# Altium PCB 00.Main.PcbDoc (part 5 of 5)
Units mm, origin at the board's own origin, x right, y up, seen from the top; angles counter-clockwise.
Board outline 300 x 165 mm, 2 copper layers (Top Layer, Bottom Layer); 76 components, 103 nets, 576 pads, 97 vias.
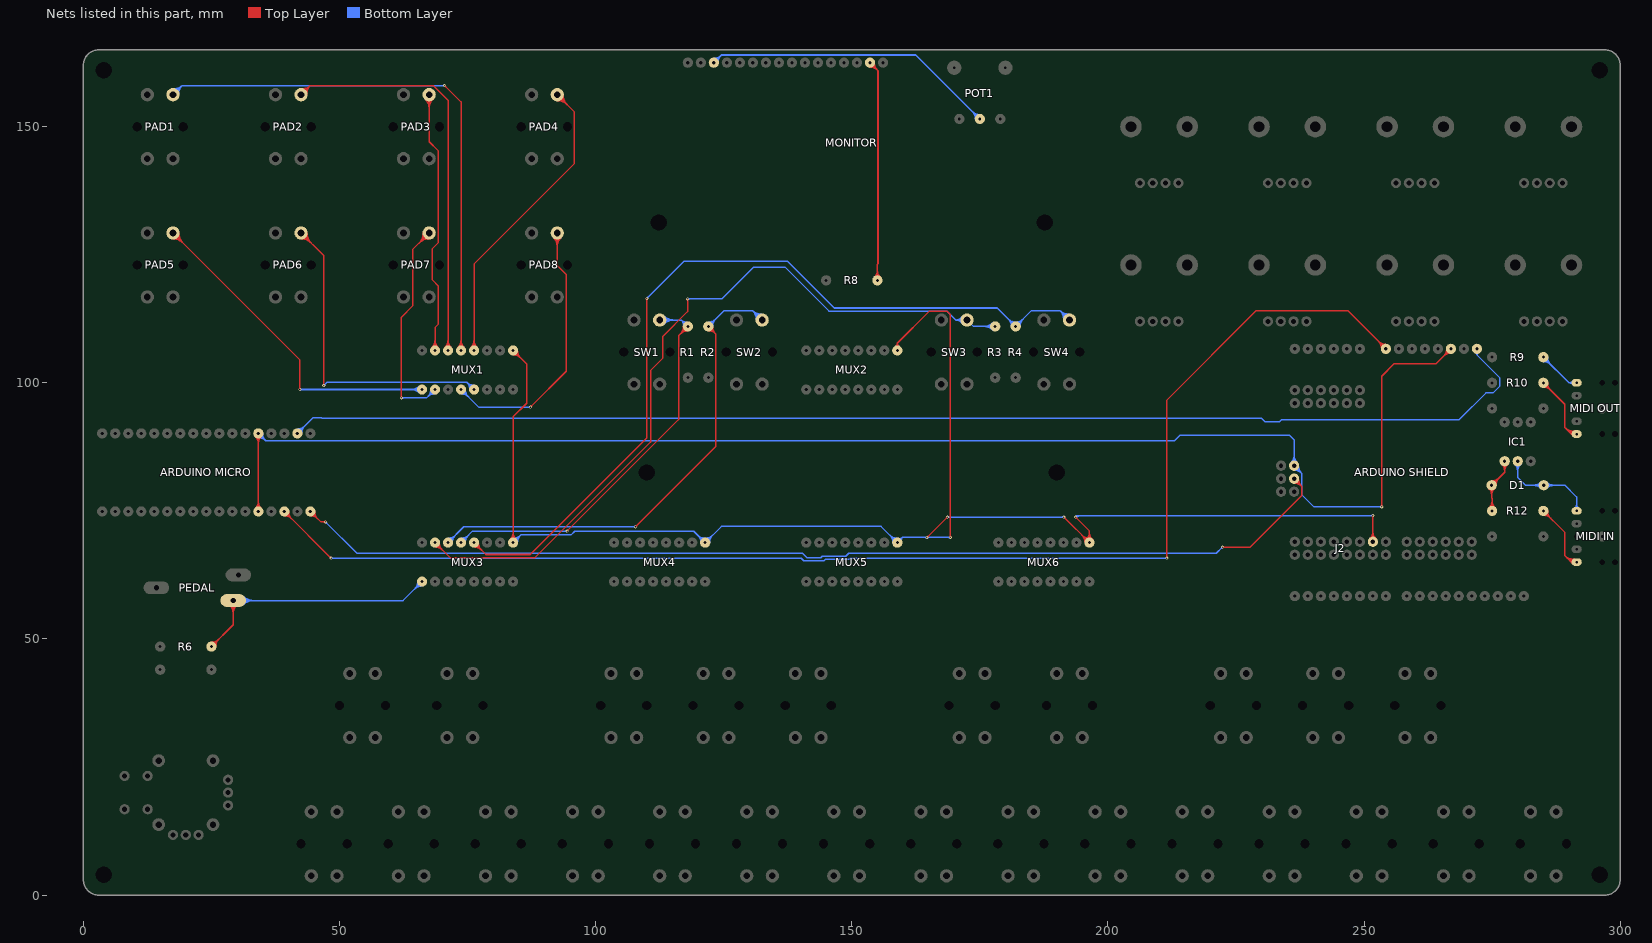
[diagram p5: the nets of this part, all layers, seen from the top]

## Via types
v1: diameter 0.6, hole 0.3, Top Layer to Bottom Layer, 97 vias

## Nets (pads, with @x,y where several pads share a name; then routed paths per layer and width w, separated by ;. In a path a pad name is that pad's centre, name@x,y a point inside that pad or via, vN(x,y) a via of type N, cw(c..) or ccw(c..) an arc to the next point about the centre after c; other vN are vias at no path point) (continued)
MUX_SC: J2.14 MUX1.9 MUX2.9 MUX3.9 MUX4.9 MUX5.9 MUX6.9 | length 351.6
  Top Layer w0.3: MUX3.9@83.289,69.411 ccw(c81.838,70.862) 83.89,70.862 ccw(c85.942,70.862) MUX3.9@84.491,69.411 ; MUX3.9@83.501,69.199 ccw(c82.562,70.138) 83.89,70.138 ccw(c85.218,70.138) MUX3.9@84.279,69.199 ; MUX3.9@83.89,68.81 83.89,93.366 86.54,96.016 86.54,103.66 MUX1.9@83.89,106.31 ; MUX1.9@83.89,105.46 cw(c83.89,103.408) 85.341,104.859 cw(c86.792,106.31) MUX1.9@84.74,106.31 ; MUX1.9@83.89,105.76 cw(c83.89,104.432) 84.829,105.371 cw(c85.768,106.31) MUX1.9@84.44,106.31 ; MUX2.9@158.498,107.064 ccw(c158.164,107.709) 158.89,107.709 ; MUX2.9@158.89,106.31 158.89,107.709 ; MUX2.9@159.281,107.064 cw(c159.616,107.709) 158.89,107.709 ; v1(164.679,69.811) v1(168.667,73.798) ; v1@164.679,69.961 ccw(c164.679,70.323) 164.935,70.067 ccw(c165.191,69.811) v1@164.829,69.811 ; v1@168.517,73.798 cw(c168.155,73.798) 168.411,73.542 cw(c168.667,73.286) v1@168.667,73.648 ; v1@169.145,69.917 ccw(c168.889,70.173) 169.251,70.173 ccw(c169.613,70.173) v1@169.357,69.917 ; v1(169.251,69.811) 169.251,113.295 168.54,114.007 165.188,114.007 158.89,107.709 ; v1@191.402,73.648 cw(c191.402,73.286) 191.658,73.542 cw(c191.914,73.798) v1@191.552,73.798 ; v1(191.402,73.798) MUX6.9@196.39,68.81 196.39,71.094 v1(193.686,73.798) ; v1@193.686,73.648 cw(c193.686,73.286) 193.942,73.542 cw(c194.198,73.798) v1@193.836,73.798 ; MUX6.9@195.54,68.81 ccw(c193.488,68.81) 194.939,70.261 ccw(c196.39,71.712) MUX6.9@196.39,69.66 ; MUX6.9@195.789,69.411 ccw(c194.338,70.862) 196.39,70.862 ccw(c198.442,70.862) MUX6.9@196.991,69.411 ; MUX6.9@195.84,68.81 ccw(c194.512,68.81) 195.451,69.749 ccw(c196.39,70.688) MUX6.9@196.39,69.36 ; MUX6.9@196.001,69.199 ccw(c195.062,70.138) 196.39,70.138 ccw(c197.718,70.138) MUX6.9@196.779,69.199 ; J2.14@251.127,69.571 ccw(c249.676,71.022) 251.728,71.022 ccw(c253.78,71.022) J2.14@252.329,69.571 ; J2.14@251.339,69.359 ccw(c250.4,70.298) 251.728,70.298 ccw(c253.056,70.298) J2.14@252.117,69.359 ; v1@251.622,73.972 cw(c251.366,73.716) 251.728,73.716 cw(c252.09,73.716) v1@251.834,73.972 ; J2.14@251.728,68.97 v1(251.728,74.078)
  Bottom Layer w0.3: MUX3.9@83.89,68.81 85.38,70.3 95.182,70.3 95.926,71.044 119.156,71.044 MUX4.9@121.39,68.81 124.55,71.97 155.73,71.97 MUX5.9@158.89,68.81 159.891,69.811 ; MUX3.9@83.89,69.36 ccw(c83.89,70.688) 84.829,69.749 ccw(c85.768,68.81) MUX3.9@84.44,68.81 ; MUX3.9@83.89,69.66 ccw(c83.89,71.712) 85.341,70.261 ccw(c86.792,68.81) MUX3.9@84.74,68.81 ; MUX4.9@120.54,68.81 ccw(c118.488,68.81) 119.939,70.261 ccw(c121.39,71.712) 121.39,69.66 ccw(c121.39,71.712) 122.841,70.261 ccw(c124.292,68.81) MUX4.9@122.24,68.81 ; MUX4.9@120.84,68.81 ccw(c119.512,68.81) 120.451,69.749 ccw(c121.39,70.688) 121.39,69.36 ccw(c121.39,70.688) 122.329,69.749 ccw(c123.268,68.81) MUX4.9@121.94,68.81 ; MUX5.9@158.04,68.81 ccw(c155.988,68.81) 157.439,70.261 ccw(c158.89,71.712) MUX5.9@158.89,69.66 ; MUX5.9@158.34,68.81 ccw(c157.012,68.81) 157.951,69.749 ccw(c158.89,70.688) MUX5.9@158.89,69.36 ; MUX5.9@159.138,69.623 ccw(c159.358,70.343) 159.891,69.811 ; MUX5.9@159.703,69.058 cw(c160.423,69.278) 159.891,69.811 ; v1@164.573,69.705 ccw(c164.317,69.448) 164.317,69.811 ccw(c164.317,70.173) v1@164.573,69.917 ; v1@164.785,69.705 cw(c165.041,69.448) 165.041,69.811 cw(c165.041,70.173) v1@164.785,69.917 ; v1(168.667,73.798) v1(191.402,73.798) ; v1@168.773,73.692 cw(c169.029,73.436) 169.029,73.798 cw(c169.029,74.161) v1@168.773,73.904 ; v1@169.145,69.705 ccw(c168.889,69.448) 168.889,69.811 ccw(c168.889,70.173) v1@169.145,69.917 ; v1(169.251,69.811) v1(164.679,69.811) 159.891,69.811 ; v1@191.296,73.692 ccw(c191.039,73.436) 191.039,73.798 ccw(c191.039,74.161) v1@191.296,73.904 ; v1(193.686,73.798) 193.915,74.027 247.001,74.027 247.051,74.078 v1(251.728,74.078) ; v1@193.792,73.692 cw(c194.6,72.884) 194.6,74.027 ; v1@251.622,73.972 ccw(c251.366,73.716) 251.366,74.078 ccw(c251.366,74.44) v1@251.622,74.184
NetD1_1: "MIDI IN.5" D1.1 IC1.2 | length 37.2
  Bottom Layer w0.3: IC1.2@279.399,84.089 cw(c277.948,82.638) 280,82.638 cw(c282.052,82.638) IC1.2@280.601,84.089 ; IC1.2@279.611,84.301 cw(c278.672,83.362) 280,83.362 cw(c281.328,83.362) IC1.2@280.389,84.301 ; IC1.2@280,84.69 280,81.52 281.52,80 D1.1@285.08,80 289.21,80 291.5,77.71 291.5,75 ; D1.1@284.479,79.399 ccw(c283.028,77.948) 283.028,80 ccw(c283.028,82.052) D1.1@284.479,80.601 ; D1.1@284.691,79.611 ccw(c283.752,78.672) 283.752,80 ccw(c283.752,81.328) D1.1@284.691,80.389 ; D1.1@285.469,79.611 cw(c286.408,78.672) 286.408,80 cw(c286.408,81.328) D1.1@285.469,80.389 ; D1.1@285.681,79.399 cw(c287.132,77.948) 287.132,80 cw(c287.132,82.052) D1.1@285.681,80.601 ; 291.076,75.424 ccw(c290.051,76.449) 291.5,76.449 ccw(c292.949,76.449) 291.924,75.424
NetD1_2: D1.2 IC1.1 R12.2 | length 32
  Top Layer w0.3: D1.2@274.319,79.399 cw(c272.868,77.948) 274.92,77.948 cw(c276.972,77.948) D1.2@275.521,79.399 ; R12.2@274.399,75.601 ccw(c272.948,77.052) 275,77.052 ccw(c277.052,77.052) R12.2@275.601,75.601 ; D1.2@274.531,79.611 cw(c273.592,78.672) 274.92,78.672 cw(c276.248,78.672) D1.2@275.309,79.611 ; R12.2@274.611,75.389 ccw(c273.672,76.328) 275,76.328 ccw(c276.328,76.328) R12.2@275.389,75.389 ; D1.2@274.92,80.55 ccw(c274.92,81.878) 275.859,80.939 ccw(c276.798,80) D1.2@275.47,80 ; D1.2@274.92,80.85 ccw(c274.92,82.902) 276.371,81.451 ccw(c277.822,80) D1.2@275.77,80 ; R12.2@275,75 275,77.456 274.92,77.536 D1.2@274.92,80 277.46,82.54 IC1.1@277.46,84.69 ; IC1.1@276.859,84.089 cw(c275.408,82.638) 277.46,82.638 cw(c279.512,82.638) IC1.1@278.061,84.089 ; IC1.1@277.071,84.301 cw(c276.132,83.362) 277.46,83.362 cw(c278.788,83.362) IC1.1@277.849,84.301
"NetMIDI IN_2": "MIDI IN.2" R12.1 | length 25.6
  Top Layer w0.3: R12.1@285,74.15 cw(c285,72.098) 286.451,73.549 cw(c287.902,75) R12.1@285.85,75 ; R12.1@285,74.45 cw(c285,73.122) 285.939,74.061 cw(c286.878,75) R12.1@285.55,75 ; R12.1@285,75 289.149,70.851 289.149,66.28 ; 289.579,65.85 ccw(c290.955,67.226) 291.211,65.297 ; 290.008,65.421 ccw(c291.055,66.468) 291.25,65 ; 290.438,64.991 ccw(c291.156,65.709) 291.289,64.703 ; 290.678,64.818 ccw(c290.429,64.739) 290.429,65 ; 290.678,65.182 cw(c290.429,65.261) 290.429,65 ; 291.171,65.595 cw(c290.854,67.985) 289.149,66.28 ; 291.5,65 290.429,65 ; 289.149,66.28 290.429,65
"NetMIDI OUT_2": "MIDI OUT.2" R10.1 | length 25.3
  Top Layer w0.3: R10.1@285,99.15 cw(c285,97.098) 286.451,98.549 cw(c287.902,100) R10.1@285.85,100 ; R10.1@285,99.45 cw(c285,98.122) 285.939,99.061 cw(c286.878,100) R10.1@285.55,100 ; R10.1@285,100 289.19,95.81 289.19,91.27 ; 289.621,90.839 ccw(c290.966,92.184) 291.211,90.297 ; 290.052,90.408 ccw(c291.065,91.421) 291.25,90 ; 290.483,89.977 ccw(c291.165,90.658) 291.289,89.702 ; 290.672,89.839 ccw(c290.46,89.78) 290.46,90 ; 290.672,90.161 cw(c290.46,90.22) 290.46,90 ; 291.173,90.595 cw(c290.867,92.947) 289.19,91.27 ; 291.5,90 290.46,90 ; 289.19,91.27 290.46,90
"NetMIDI OUT_5": "MIDI OUT.5" R9.1 | length 15.7
  Bottom Layer w0.3: R9.1@285,104.15 cw(c285,102.098) 286.451,103.549 cw(c287.902,105) R9.1@285.85,105 ; R9.1@285,104.45 cw(c285,103.122) 285.939,104.061 cw(c286.878,105) R9.1@285.55,105 ; R9.1@285,105 290,100 ; 290.782,99.625 ccw(c290,98.998) 290,100 ; 290.782,100.375 cw(c290,101.002) 290,100 ; 291.5,100 290,100
NetMONITOR_3: MONITOR.3 POT1.2 | length 68.3
  Bottom Layer w0.3: MONITOR.3@123.08,162.5 124.574,163.994 162.506,163.994 POT1.2@175,151.5 ; MONITOR.3@123.08,163.05 ccw(c123.08,164.378) 124.019,163.439 ccw(c124.958,162.5) MONITOR.3@123.63,162.5 ; MONITOR.3@123.08,163.35 ccw(c123.08,165.402) 124.531,163.951 ccw(c125.982,162.5) MONITOR.3@123.93,162.5 ; POT1.2@174.15,151.5 ccw(c172.098,151.5) 173.549,152.951 ccw(c175,154.402) POT1.2@175,152.35 ; POT1.2@174.45,151.5 ccw(c173.122,151.5) 174.061,152.439 ccw(c175,153.378) POT1.2@175,152.05
NetMONITOR_15: MONITOR.15 R8.2 | length 53.8
  Top Layer w0.3: MONITOR.15@153.56,161.65 cw(c153.56,159.598) 155.011,161.049 cw(c156.462,162.5) MONITOR.15@154.41,162.5 ; MONITOR.15@153.56,161.95 cw(c153.56,160.622) 154.499,161.561 ; MONITOR.15@153.56,162.5 155.12,160.94 155.12,123.282 155,123.162 R8.2@155,120 ; MONITOR.15@154.11,162.5 ccw(c155.438,162.5) 154.499,161.561 ; R8.2@154.399,120.601 ccw(c152.948,122.052) 155,122.052 ccw(c157.052,122.052) R8.2@155.601,120.601 ; R8.2@154.611,120.389 ccw(c153.672,121.328) 155,121.328 ccw(c156.328,121.328) R8.2@155.389,120.389
PAD1: MUX1.13 PAD1.2 | length 119.7
  Top Layer w0.3: v1@70.521,157.875 cw(c70.521,157.513) 70.777,157.769 cw(c71.034,158.025) v1@70.671,158.025 ; v1(70.521,158.025) 73.73,154.816 MUX1.13@73.73,106.31 ; MUX1.13@73.129,106.911 ccw(c71.678,108.362) 73.73,108.362 ccw(c75.782,108.362) MUX1.13@74.331,106.911 ; MUX1.13@73.341,106.699 ccw(c72.402,107.638) 73.73,107.638 ccw(c75.058,107.638) MUX1.13@74.119,106.699
  Bottom Layer w0.3: PAD1.2@17.5,156.25 19.275,158.025 ; PAD1.2@17.563,157.098 ccw(c17.681,158.693) 18.812,157.562 ccw(c19.943,156.431) PAD1.2@18.348,156.313 ; PAD1.2@17.585,157.397 ccw(c17.745,159.555) 19.275,158.025 ; PAD1.2@18.647,156.335 cw(c20.805,156.495) 19.275,158.025 ; v1@70.415,157.919 ccw(c70.159,157.663) 70.159,158.025 ccw(c70.159,158.387) v1@70.415,158.131 ; v1(70.521,158.025) 19.275,158.025
PAD2: MUX1.14 PAD2.2 | length 91.2
  Top Layer w0.3: PAD2.2@42.5,156.25 44.275,158.025 ; PAD2.2@42.563,157.098 ccw(c42.681,158.693) 43.812,157.562 ccw(c44.943,156.431) PAD2.2@43.348,156.313 ; PAD2.2@42.585,157.397 ccw(c42.745,159.555) 44.275,158.025 ; PAD2.2@43.647,156.335 cw(c45.805,156.495) 44.275,158.025 ; MUX1.14@70.589,106.911 ccw(c69.138,108.362) 71.19,108.362 ccw(c73.242,108.362) MUX1.14@71.791,106.911 ; MUX1.14@70.801,106.699 ccw(c69.862,107.638) 71.19,107.638 ccw(c72.518,107.638) MUX1.14@71.579,106.699 ; MUX1.14@71.19,106.31 71.19,155.146 68.312,158.025 44.275,158.025
PAD3: MUX1.15 PAD3.2 | length 66.8
  Top Layer w0.3: PAD3.2@66.687,155.437 cw(c64.724,153.474) 67.5,153.474 cw(c70.276,153.474) PAD3.2@68.313,155.437 ; PAD3.2@66.899,155.649 cw(c65.448,154.198) 67.5,154.198 cw(c69.552,154.198) PAD3.2@68.101,155.649 ; PAD3.2@67.111,155.861 cw(c66.172,154.922) 67.5,154.922 cw(c68.828,154.922) PAD3.2@67.889,155.861 ; PAD3.2@67.5,156.25 67.5,147.077 69.251,145.326 69.251,127.316 68.134,126.199 68.134,120.077 69.251,118.96 69.251,111.39 68.65,110.789 MUX1.15@68.65,106.31 ; MUX1.15@68.049,106.911 ccw(c66.598,108.362) 68.65,108.362 ccw(c70.702,108.362) MUX1.15@69.251,106.911 ; MUX1.15@68.261,106.699 ccw(c67.322,107.638) 68.65,107.638 ccw(c69.978,107.638) MUX1.15@69.039,106.699
PAD4: MUX1.12 PAD4.2 | length 74.4
  Top Layer w0.3: MUX1.12@75.669,106.911 ccw(c74.218,108.362) 76.27,108.362 ccw(c78.322,108.362) MUX1.12@76.871,106.911 ; MUX1.12@75.881,106.699 ccw(c74.942,107.638) 76.27,107.638 ccw(c77.598,107.638) MUX1.12@76.659,106.699 ; MUX1.12@76.27,106.31 76.27,123.184 95.871,142.785 95.871,152.879 PAD4.2@92.5,156.25 ; PAD4.2@92.5,155.1 cw(c92.5,152.324) 94.463,154.287 cw(c96.426,156.25) PAD4.2@93.65,156.25 ; PAD4.2@92.5,155.4 cw(c92.5,153.348) 93.951,154.799 cw(c95.402,156.25) PAD4.2@93.35,156.25 ; PAD4.2@92.5,155.7 cw(c92.5,154.372) 93.439,155.311 cw(c94.378,156.25) PAD4.2@93.05,156.25
PAD5: MUX1.1 PAD5.2 | length 80.8
  Top Layer w0.3: PAD5.2@17.5,128.1 cw(c17.5,125.324) 19.463,127.287 cw(c21.426,129.25) PAD5.2@18.65,129.25 ; PAD5.2@17.5,128.4 cw(c17.5,126.348) 18.951,127.799 cw(c20.402,129.25) PAD5.2@18.35,129.25 ; PAD5.2@17.5,128.7 cw(c17.5,127.372) 18.439,128.311 cw(c19.378,129.25) PAD5.2@18.05,129.25 ; PAD5.2@17.5,129.25 42.277,104.473 v1(42.277,98.69) ; v1@42.171,98.796 ccw(c41.914,99.052) 42.277,99.052 ccw(c42.639,99.052) v1@42.383,98.796
  Bottom Layer w0.3: v1(42.277,98.69) MUX1.1@66.11,98.69 ; v1@42.383,98.584 cw(c42.639,98.328) 42.639,98.69 cw(c42.639,99.052) v1@42.383,98.796 ; MUX1.1@65.509,98.089 ccw(c64.058,96.638) 64.058,98.69 ccw(c64.058,100.742) MUX1.1@65.509,99.291 ; MUX1.1@65.721,98.301 ccw(c64.782,97.362) 64.782,98.69 ccw(c64.782,100.018) MUX1.1@65.721,99.079
PAD6: MUX1.5 PAD6.2 | length 78
  Top Layer w0.3: PAD6.2@42.5,128.1 cw(c42.5,125.324) 44.463,127.287 cw(c46.426,129.25) PAD6.2@43.65,129.25 ; PAD6.2@42.5,128.4 cw(c42.5,126.348) 43.951,127.799 cw(c45.402,129.25) PAD6.2@43.35,129.25 ; PAD6.2@42.5,128.7 cw(c42.5,127.372) 43.439,128.311 cw(c44.378,129.25) PAD6.2@43.05,129.25 ; PAD6.2@42.5,129.25 46.925,124.825 v1(46.925,99.452) ; v1@46.819,99.558 ccw(c46.563,99.815) 46.925,99.815 ccw(c47.287,99.815) v1@47.031,99.558
  Bottom Layer w0.3: v1(46.925,99.452) 47.612,100.14 74.82,100.14 ; v1@46.925,99.602 ccw(c46.925,99.965) 47.181,99.708 ccw(c47.437,99.452) v1@47.075,99.452 ; MUX1.5@75.42,98.69 ccw(c73.372,98.692) 74.82,100.14 ; MUX1.5@75.72,98.69 ccw(c74.395,98.691) 75.332,99.628 ccw(c76.269,100.565) MUX1.5@76.27,99.24 ; MUX1.5@76.27,98.69 74.82,100.14 ; MUX1.5@76.27,99.54 cw(c76.269,101.588) 74.82,100.14
PAD7: MUX1.2 PAD7.2 | length 57.8
  Top Layer w0.3: v1@61.983,97.145 ccw(c61.726,97.402) 62.089,97.402 ccw(c62.451,97.402) v1@62.195,97.145 ; v1(62.089,97.039) 62.089,112.813 64.273,114.997 64.273,126.023 PAD7.2@67.5,129.25 ; PAD7.2@66.35,129.25 cw(c63.574,129.25) 65.537,127.287 cw(c67.5,125.324) PAD7.2@67.5,128.1 ; PAD7.2@66.65,129.25 cw(c64.598,129.25) 66.049,127.799 cw(c67.5,126.348) PAD7.2@67.5,128.4 ; PAD7.2@66.95,129.25 cw(c65.622,129.25) 66.561,128.311 cw(c67.5,127.372) PAD7.2@67.5,128.7
  Bottom Layer w0.3: v1(62.089,97.039) 66.999,97.039 MUX1.2@68.65,98.69 ; v1@62.195,96.933 cw(c62.451,96.677) 62.451,97.039 cw(c62.451,97.402) v1@62.195,97.145 ; MUX1.2@67.8,98.69 cw(c65.748,98.69) 67.199,97.239 cw(c68.65,95.788) MUX1.2@68.65,97.84 ; MUX1.2@68.1,98.69 cw(c66.772,98.69) 67.711,97.751 cw(c68.65,96.812) MUX1.2@68.65,98.14
PAD8: MUX1.4 PAD8.2 | length 68.7
  Top Layer w0.3: v1(87.285,95.261) 94.27,102.246 94.27,121.119 92.5,122.889 PAD8.2@92.5,129.25 ; v1@87.285,95.411 ccw(c87.285,95.774) 87.541,95.517 ccw(c87.798,95.261) v1@87.435,95.261 ; PAD8.2@91.687,128.437 cw(c89.724,126.474) 92.5,126.474 cw(c95.276,126.474) PAD8.2@93.313,128.437 ; PAD8.2@91.899,128.649 cw(c90.448,127.198) 92.5,127.198 cw(c94.552,127.198) PAD8.2@93.101,128.649 ; PAD8.2@92.111,128.861 cw(c91.172,127.922) 92.5,127.922 cw(c93.828,127.922) PAD8.2@92.889,128.861
  Bottom Layer w0.3: MUX1.4@73.73,97.84 cw(c73.73,95.788) 75.181,97.239 cw(c76.632,98.69) MUX1.4@74.58,98.69 ; MUX1.4@73.73,98.14 cw(c73.73,96.812) 74.669,97.751 cw(c75.608,98.69) MUX1.4@74.28,98.69 ; MUX1.4@73.73,98.69 77.159,95.261 v1(87.285,95.261) ; v1@87.179,95.155 ccw(c86.923,94.899) 86.923,95.261 ccw(c86.923,95.624) v1@87.179,95.367
PEDAL: MUX3.1 PEDAL.2 R6.2 | length 74.2
  Top Layer w0.3: R6.2@25,48.5 29.25,52.75 PEDAL.2@29.25,57.5 ; R6.2@25,49.05 ccw(c25,50.378) 25.939,49.439 ccw(c26.878,48.5) R6.2@25.55,48.5 ; R6.2@25,49.35 ccw(c25,51.402) 26.451,49.951 ccw(c27.902,48.5) R6.2@25.85,48.5 ; PEDAL.2@28.472,56.722 cw(c26.594,54.844) 29.25,54.844 cw(c31.906,54.844) PEDAL.2@30.028,56.722 ; PEDAL.2@28.684,56.934 cw(c27.319,55.569) 29.25,55.569 cw(c31.181,55.569) PEDAL.2@29.816,56.934
  Bottom Layer w0.3: PEDAL.2@29.25,57.5 62.42,57.5 MUX3.1@66.11,61.19 ; PEDAL.2@31.066,56.934 cw(c32.431,55.569) 32.431,57.5 cw(c32.431,59.431) PEDAL.2@31.066,58.066 ; PEDAL.2@31.278,56.722 cw(c33.156,54.844) 33.156,57.5 cw(c33.156,60.156) PEDAL.2@31.278,58.278 ; MUX3.1@65.26,61.19 cw(c63.208,61.19) 64.659,59.739 cw(c66.11,58.288) MUX3.1@66.11,60.34 ; MUX3.1@65.56,61.19 cw(c64.232,61.19) 65.171,60.251 cw(c66.11,59.312) MUX3.1@66.11,60.64
RESET: "ARDUINO MICRO.13" "ARDUINO MICRO.22" "ARDUINO SHIELD.3" "ARDUINO SHIELD.5\"" | length 321
  Top Layer w0.3: 33.559,75.481 ccw(c32.108,76.932) 34.16,76.932 ccw(c36.212,76.932) 34.761,75.481 ; 33.559,89.519 cw(c32.108,88.068) 34.16,88.068 cw(c36.212,88.068) 34.761,89.519 ; 33.771,75.269 ccw(c32.832,76.208) 34.16,76.208 ccw(c35.488,76.208) 34.549,75.269 ; 33.771,89.731 cw(c32.832,88.792) 34.16,88.792 cw(c35.488,88.792) 34.549,89.731 ; 34.16,74.88 34.16,90.12 ; v1@253.346,75.886 ccw(c253.09,76.142) 253.452,76.142 ccw(c253.814,76.142) v1@253.558,75.886 ; v1(253.452,75.78) 253.452,101.281 255.916,103.745 264.083,103.745 266.968,106.63 ; 266.118,106.63 cw(c264.066,106.63) 265.517,105.179 cw(c266.968,103.728) 266.968,105.78 ; 266.418,106.63 cw(c265.09,106.63) 266.029,105.691 cw(c266.968,104.752) 266.968,106.08
  Bottom Layer w0.3: 34.16,89.27 cw(c34.16,87.218) 35.611,88.669 cw(c37.062,90.12) 35.01,90.12 ; 34.16,89.57 cw(c34.16,88.242) 35.099,89.181 cw(c36.038,90.12) 34.71,90.12 ; 34.16,90.12 35.623,88.657 212.95,88.657 214.03,89.738 235.508,89.738 236.348,88.897 236.348,83.82 237.806,82.362 237.806,78.193 240.219,75.78 v1(253.452,75.78) ; 235.747,84.421 ccw(c234.296,85.872) 236.348,85.872 ccw(c238.4,85.872) 236.949,84.421 ; 235.959,84.209 ccw(c235.02,85.148) 236.348,85.148 ccw(c237.676,85.148) 236.737,84.209 ; 236.348,82.97 cw(c236.348,80.918) 237.799,82.369 cw(c239.25,83.82) 237.198,83.82 ; 236.348,83.27 cw(c236.348,81.942) 237.287,82.881 cw(c238.226,83.82) 236.898,83.82 ; v1@253.346,75.674 ccw(c253.09,75.417) 253.09,75.78 ccw(c253.09,76.142) v1@253.346,75.886
SCK: "ARDUINO MICRO.17" "ARDUINO SHIELD.3\"" | length 219
  Top Layer w0.3: 44.32,74.03 cw(c44.32,71.978) 45.771,73.429 cw(c47.222,74.88) 45.17,74.88 ; 44.32,74.33 cw(c44.32,73.002) 45.259,73.941 cw(c46.198,74.88) 44.87,74.88 ; 44.32,74.88 46.367,72.833 v1(47.28,72.833) ; v1@47.174,72.727 ccw(c46.918,72.471) 46.918,72.833 ccw(c46.918,73.195) v1@47.174,72.939 ; v1(222.388,67.931) 227.773,67.931 237.798,77.956 237.798,79.83 ; v1@222.494,67.825 cw(c222.75,67.569) 222.75,67.931 cw(c222.75,68.293) v1@222.494,68.037 ; 236.348,80.43 cw(c236.35,78.382) 237.798,79.83 ; 236.348,80.73 cw(c236.349,79.405) 237.286,80.342 cw(c238.223,81.279) 236.898,81.28 ; 236.348,81.28 237.798,79.83 ; 237.198,81.28 ccw(c239.246,81.279) 237.798,79.83
  Bottom Layer w0.3: v1@47.28,72.683 cw(c47.28,72.321) 47.536,72.577 cw(c47.793,72.833) v1@47.43,72.833 ; v1(47.28,72.833) 53.402,66.712 140.395,66.712 141.247,65.86 143.957,65.86 144.257,66.16 148.84,66.16 149.392,66.712 221.169,66.712 v1(222.388,67.931) ; v1@222.238,67.931 cw(c221.876,67.931) 222.132,67.675 cw(c222.388,67.419) v1@222.388,67.781
SS: "ARDUINO MICRO.19" "ARDUINO SHIELD.1" | length 254.6
  Bottom Layer w0.3: 41.78,90.12 44.877,93.217 46.493,93.217 46.633,93.077 229.987,93.077 230.676,92.387 233.505,92.387 233.898,92.78 268.552,92.78 273.803,98.03 275.195,98.03 276.465,99.3 276.465,101.027 272.048,105.444 ; 41.78,90.67 ccw(c41.78,91.998) 42.719,91.059 ccw(c43.658,90.12) 42.33,90.12 ; 41.78,90.97 ccw(c41.78,93.022) 43.231,91.571 ccw(c44.682,90.12) 42.63,90.12 ; 271.775,105.825 cw(c271.645,105.444) 272.048,105.444 ; 272.048,106.63 272.048,105.444 ; 272.321,105.825 ccw(c272.451,105.444) 272.048,105.444
SW1: MUX3.13 R1.2 SW1.2 | length 103
  Top Layer w0.3: v1(94.423,71.055) 116.191,92.823 116.191,109.191 R1.2@118,111 ; v1@94.423,71.205 ccw(c94.423,71.567) 94.679,71.311 ccw(c94.935,71.055) v1@94.573,71.055 ; R1.2@117.15,111 cw(c115.098,111) 116.549,109.549 cw(c118,108.098) R1.2@118,110.15 ; R1.2@117.45,111 cw(c116.122,111) 117.061,110.061 cw(c118,109.122) R1.2@118,110.45
  Bottom Layer w0.3: MUX3.13@73.73,68.81 75.975,71.055 v1(94.423,71.055) ; MUX3.13@73.73,69.36 ccw(c73.73,70.688) 74.669,69.749 ccw(c75.608,68.81) MUX3.13@74.28,68.81 ; MUX3.13@73.73,69.66 ccw(c73.73,71.712) 75.181,70.261 ccw(c76.632,68.81) MUX3.13@74.58,68.81 ; v1@94.317,70.949 ccw(c94.061,70.693) 94.061,71.055 ccw(c94.061,71.417) v1@94.317,71.161 ; SW1.2@112.5,112.25 116.75,112.25 R1.2@118,111 ; SW1.2@112.889,111.861 cw(c113.828,110.922) 113.828,112.25 cw(c113.828,113.578) SW1.2@112.889,112.639 ; SW1.2@113.101,111.649 cw(c114.552,110.198) 114.552,112.25 cw(c114.552,114.302) SW1.2@113.101,112.851 ; SW1.2@113.313,111.437 cw(c115.276,109.474) 115.276,112.25 cw(c115.276,115.026) SW1.2@113.313,113.063 ; R1.2@117.155,111.094 ccw(c115.751,111.251) 116.75,112.25 ccw(c117.749,113.249) R1.2@117.906,111.845 ; R1.2@117.453,111.061 ccw(c116.545,111.162) 117.191,111.809 ccw(c117.838,112.455) R1.2@117.939,111.547
SW2: MUX3.14 R2.2 SW2.2 | length 120.7
  Top Layer w0.3: v1(107.783,71.893) 123.455,87.565 123.455,109.545 R2.2@122,111 ; v1@107.783,72.043 ccw(c107.783,72.406) 108.039,72.149 ccw(c108.295,71.893) v1@107.933,71.893 ; R2.2@122,110.15 cw(c122,108.098) 123.451,109.549 cw(c124.902,111) R2.2@122.85,111 ; R2.2@122,110.45 cw(c122,109.122) 122.939,110.061 cw(c123.878,111) R2.2@122.55,111
  Bottom Layer w0.3: MUX3.14@71.19,68.81 74.273,71.893 v1(107.783,71.893) ; MUX3.14@71.19,69.36 ccw(c71.19,70.688) 72.129,69.749 ccw(c73.068,68.81) MUX3.14@71.74,68.81 ; MUX3.14@71.19,69.66 ccw(c71.19,71.712) 72.641,70.261 ccw(c74.092,68.81) MUX3.14@72.04,68.81 ; v1@107.677,71.787 ccw(c107.421,71.531) 107.421,71.893 ccw(c107.421,72.256) v1@107.677,71.999 ; R2.2@122,111 125.108,114.108 130.642,114.108 ; R2.2@122,111.55 ccw(c122,112.878) 122.939,111.939 ccw(c123.878,111) R2.2@122.55,111 ; R2.2@122,111.85 ccw(c122,113.902) 123.451,112.451 ccw(c124.902,111) R2.2@122.85,111 ; SW2.2@131.351,112.296 ccw(c128.926,112.392) 130.642,114.108 ; SW2.2@131.651,112.284 ccw(c129.858,112.355) 131.127,113.623 ccw(c132.395,114.892) SW2.2@132.466,113.099 ; SW2.2@132.454,113.399 cw(c132.358,115.824) 130.642,114.108 ; SW2.2@132.5,112.25 130.642,114.108
SW3: MUX3.15 R3.2 SW3.2 | length 167.9
  Top Layer w0.3: MUX3.15@68.65,67.96 cw(c68.65,65.908) 70.101,67.359 cw(c71.552,68.81) MUX3.15@69.5,68.81 ; MUX3.15@68.65,68.26 cw(c68.65,66.932) 69.589,67.871 cw(c70.528,68.81) MUX3.15@69.2,68.81 ; MUX3.15@68.65,68.81 71.586,65.874 88.169,65.874 110.73,88.435 110.73,102.424 113.143,104.837 113.143,109.104 117.943,113.905 v1(117.943,116.369) ; v1@117.837,116.263 cw(c117.581,116.007) 117.943,116.007 cw(c118.305,116.007) v1@118.049,116.263
  Bottom Layer w0.3: v1(117.943,116.369) 124.623,116.369 130.77,122.516 137.044,122.516 145.56,114 168.54,114 170.29,112.25 ; v1@118.049,116.263 cw(c118.305,116.007) 118.305,116.369 cw(c118.305,116.731) v1@118.049,116.475 ; SW3.2@171.558,111.59 ccw(c170.29,110.702) 170.29,112.25 ; SW3.2@171.558,112.91 cw(c170.29,113.798) 170.29,112.25 ; SW3.2@171.804,111.762 ccw(c170.867,111.106) 170.867,112.25 ccw(c170.867,113.394) SW3.2@171.804,112.738 ; R3.2@177.399,110.399 ccw(c175.948,108.948) 175.948,111 ccw(c175.948,113.052) R3.2@177.399,111.601 ; R3.2@177.611,110.611 ccw(c176.672,109.672) 176.672,111 ccw(c176.672,112.328) R3.2@177.611,111.389 ; R3.2@178,111 173.75,111 SW3.2@172.5,112.25 170.29,112.25
SW4: MUX3.12 R4.2 SW4.2 | length 188.3
  Top Layer w0.3: MUX3.12@76.27,67.96 cw(c76.27,65.908) 77.721,67.359 cw(c79.172,68.81) MUX3.12@77.12,68.81 ; MUX3.12@76.27,68.26 cw(c76.27,66.932) 77.209,67.871 cw(c78.148,68.81) MUX3.12@76.82,68.81 ; MUX3.12@76.27,68.81 78.597,66.483 87.26,66.483 109.993,89.216 v1(109.993,116.47) ; v1@109.887,116.364 cw(c109.631,116.108) 109.993,116.108 cw(c110.355,116.108) v1@110.099,116.364
  Bottom Layer w0.3: v1(109.993,116.47) 117.283,123.76 137.4,123.76 146.56,114.6 178.4,114.6 R4.2@182,111 185.108,114.108 190.642,114.108 ; v1@109.993,116.62 ccw(c109.993,116.983) 110.249,116.726 ccw(c110.505,116.47) v1@110.143,116.47 ; R4.2@181.15,111 ccw(c179.098,111) 180.549,112.451 ccw(c182,113.902) 182,111.85 ccw(c182,113.902) 183.451,112.451 ccw(c184.902,111) R4.2@182.85,111 ; R4.2@181.45,111 ccw(c180.122,111) 181.061,111.939 ccw(c182,112.878) 182,111.55 ccw(c182,112.878) 182.939,111.939 ccw(c183.878,111) R4.2@182.55,111 ; SW4.2@191.351,112.296 ccw(c188.926,112.392) 190.642,114.108 ; SW4.2@191.651,112.284 ccw(c189.858,112.355) 191.127,113.623 ccw(c192.395,114.892) SW4.2@192.466,113.099 ; SW4.2@192.454,113.399 cw(c192.358,115.824) 190.642,114.108 ; SW4.2@192.5,112.25 190.642,114.108
VIN: "ARDUINO MICRO.15" "ARDUINO SHIELD.8" | length 273.3
  Top Layer w0.3: 39.24,74.03 cw(c39.24,71.978) 40.691,73.429 cw(c42.142,74.88) 40.09,74.88 ; 39.24,74.33 cw(c39.24,73.002) 40.179,73.941 cw(c41.118,74.88) 39.79,74.88 ; 39.24,74.88 v1(48.348,65.772) ; v1@48.198,65.772 ccw(c47.836,65.772) 48.092,66.028 ccw(c48.348,66.284) v1@48.348,65.922 ; v1@211.411,65.878 ccw(c211.155,66.134) 211.517,66.134 ccw(c211.879,66.134) v1@211.623,65.878 ; v1(211.517,65.772) 211.517,96.633 228.934,114.05 246.848,114.05 254.268,106.63 ; 253.418,106.63 ccw(c251.366,106.63) 252.817,108.081 ccw(c254.268,109.532) 254.268,107.48 ; 253.718,106.63 ccw(c252.39,106.63) 253.329,107.569 ccw(c254.268,108.508) 254.268,107.18
  Bottom Layer w0.3: v1(48.348,65.772) 140.135,65.772 140.647,65.26 144.557,65.26 144.857,65.56 149.44,65.56 149.652,65.772 v1(211.517,65.772) ; v1@48.454,65.666 cw(c48.71,65.41) 48.71,65.772 cw(c48.71,66.134) v1@48.454,65.878 ; v1@211.411,65.666 ccw(c211.155,65.41) 211.155,65.772 ccw(c211.155,66.134) v1@211.411,65.878
pads on no net: "ARDUINO MICRO.10" "ARDUINO MICRO.11" "ARDUINO SHIELD.2" "MIDI IN.0" "MIDI IN.1" "MIDI IN.3" "MIDI IN.4" "MIDI OUT.0" "MIDI OUT.3" "MIDI OUT.4" IC1.3 JOYSTICK.0 KEY1. KEY2. KEY3. KEY4. KEY5. KEY6. KEY7. KEY8. KEY9. KEY10. KEY11. KEY12. KEY13. KEY14. KEY15. KEY16. KEY17. KEY18. KEY19. KEY20. KEY21. KEY22. KEY23. KEY24. KEY25. KNOB1.0 KNOB2.0 KNOB3.0 KNOB4.0 KNOB5.0 KNOB6.0 KNOB7.0 KNOB8.0 MONITOR.7 MONITOR.8 MONITOR.9 MONITOR.10 MONITOR.G PAD1. PAD2. PAD3. PAD4. PAD5. PAD6. PAD7. PAD8. POT1.0 SW1. SW2. SW3. SW4.

## Polygon pours and split planes (outlines as drawn)
GND on Bottom Layer "Bottom Layer-No Net" (solid, remove dead copper, pour order 2): 0,165 300,165 300,0 0,0 0,165
GND on Top Layer "Bottom Layer-No Net" (solid, remove dead copper, pour order 4): 0,165 300,165 300,0 0,0 0,165

## Keep-outs
Keep-Out Layer:
  the board outline again, w0.254

## Silkscreen, mask and mechanical layers (free items; w line width, h text height)
Top Overlay:
  drawing of 373 lines, arcs and shapes, not listed
  text "Monitor" at 192,148 h2.54
  text "Contrast" at 192,145 h2.54
  text "MENU" at 114,119 h5
  text "VALUE" at 173,119 h5
  text "A5" at 235.925,104 h2.54 r270
  text "A4" at 238.465,104 h2.54 r270
  text "A3" at 241.005,104 h2.54 r270
  text "A2" at 243.545,104 h2.54 r270
  text "A1" at 246.085,104 h2.54 r270
  text "A0" at 248.625,104 h2.54 r270
  text "VIN" at 253.705,104 h2.54 r270
  text "GND" at 256.245,104 h2.54 r270
  text "GND" at 258.785,104 h2.54 r270
  text "5V" at 261.325,104 h2.54 r270
  text "3V3" at 263.865,104 h2.54 r270
  text "RESET" at 266.405,104 h2.54 r270
  text "NC" at 268.945,104 h2.54 r270
  text "SS" at 271.485,104 h2.54 r270
  text "MUX6" at 235.925,93.4 h2.54 r270
  text "MUX5" at 238.465,93.4 h2.54 r270
  text "MUX4" at 241.005,93.4 h2.54 r270
  text "MUX3" at 243.545,93.4 h2.54 r270
  text "MUX2" at 246.085,93.4 h2.54 r270
  text "MUX1" at 248.625,93.4 h2.54 r270
  text "PCB Version 1.2" at 12,84 h4
  text "GND" at 226.778,83.257 h2.54
  text "RESET" at 238.978,83.257 h2.54
  text "MainnoLab" at 57,82.5 h12
  text "MOSI" at 226.078,80.717 h2.54
  text "SCK" at 238.978,80.717 h2.54
  text "MUX_SA" at 245.816,80.5 h2.54 r270
  text "MUX_SB" at 248.356,80.5 h2.54 r270
  text "MUX_SC" at 250.896,80.5 h2.54 r270
  text "LCD_RS" at 253.436,80.5 h2.54 r270
  text "LCD_EN" at 257.5,80.5 h2.54 r270
  text "LCD_D4" at 260.04,80.5 h2.54 r270
  text "LCD_D5" at 262.58,80.5 h2.54 r270
  text "LCD_D6" at 265.12,80.5 h2.54 r270
  text "LCD_D7" at 267.66,80.5 h2.54 r270
  text "JOY_SW" at 270.2,80.5 h2.54 r270
  text "Made in Taiwan" at 12,79 h4
  text "5V" at 228.878,78.177 h2.54
  text "MISO" at 238.978,78.177 h2.54
  text "BC-101" at 121.6,77.5 h22
  text "Music Technology for Everyone" at 51,76.5 h5.5
  text "SDA" at 240.736,75.75 h2.54 r270
  text "SCL" at 243.276,75.75 h2.54 r270
  text "MIDI_OUT" at 226,74 h2.54
  text "MIDI_IN" at 226,71 h2.54
  text "AREF" at 275.549,66 h2.54 r270
  text "GND" at 273.009,65 h2.54 r270
  text "SDA" at 278.089,65 h2.54 r270
  text "SCL" at 280.629,65 h2.54 r270
  text "D10" at 262.849,64.325 h2.54 r270
  text "D11" at 265.389,64.325 h2.54 r270
  text "D12" at 267.929,64.325 h2.54 r270
  text "D13" at 270.469,64.325 h2.54 r270
  text "D0" at 235.925,63.8 h2.54 r270
  text "D1" at 238.465,63.8 h2.54 r270
  text "D2" at 241.005,63.8 h2.54 r270
  text "D3" at 243.545,63.8 h2.54 r270
  text "D4" at 246.085,63.8 h2.54 r270
  text "D5" at 248.625,63.8 h2.54 r270
  text "D6" at 251.165,63.8 h2.54 r270
  text "D7" at 253.705,63.8 h2.54 r270
  text "D8" at 257.769,63.8 h2.54 r270
  text "D9" at 260.309,63.8 h2.54 r270
Mechanical 1:
  lines w0.2: 38.8,0 38.8,50 55.2,50 55.2,49 48,49 48,22 55.2,22 55.2,0 ; 55.8,0 55.8,22 61,22 61,49 55.8,49 55.8,50 72.2,50 72.2,49 67,49 67,22 72.2,22 72.2,0 ; 72.8,0 72.8,22 80,22 80,49 72.8,49 72.8,50 89.2,50 89.2,0 ; 89.8,0 89.8,50 106.2,50 106.2,49 99,49 99,22 106.2,22 106.2,0 ; 106.8,0 106.8,22 112,22 112,49 106.8,49 106.8,50 123.2,50 123.2,49 117,49 117,22 123.2,22 123.2,0 ; 123.8,0 123.8,22 130,22 130,49 123.8,49 123.8,50 140.2,50 140.2,49 135,49 135,22 140.2,22 140.2,0 ; 140.8,0 140.8,22 148,22 148,49 140.8,49 140.8,50 157.2,50 157.2,0 ; 157.8,0 157.8,50 174.2,50 174.2,49 167,49 167,22 174.2,22 174.2,0 ; 174.8,0 174.8,22 180,22 180,49 174.8,49 174.8,50 191.2,50 191.2,49 186,49 186,22 191.2,22 191.2,0 ; 191.8,0 191.8,22 199,22 199,49 191.8,49 191.8,50 208.2,50 208.2,0 ; 208.8,0 208.8,50 225.2,50 225.2,49 218,49 218,22 225.2,22 225.2,0 ; 225.8,0 225.8,22 231,22 231,49 225.8,49 225.8,50 242.2,50 242.2,49 236,49 236,22 242.2,22 242.2,0 ; 242.8,0 242.8,22 249,22 249,49 242.8,49 242.8,50 259.2,50 259.2,49 254,49 254,22 259.2,22 259.2,0 ; 259.8,0 259.8,22 267,22 267,49 259.8,49 259.8,50 276.2,50 276.2,0 ; 276.8,0 276.8,50 293.2,50 293.2,0